# EAGLE board Panel V1 (EAGLE 7.2.0)
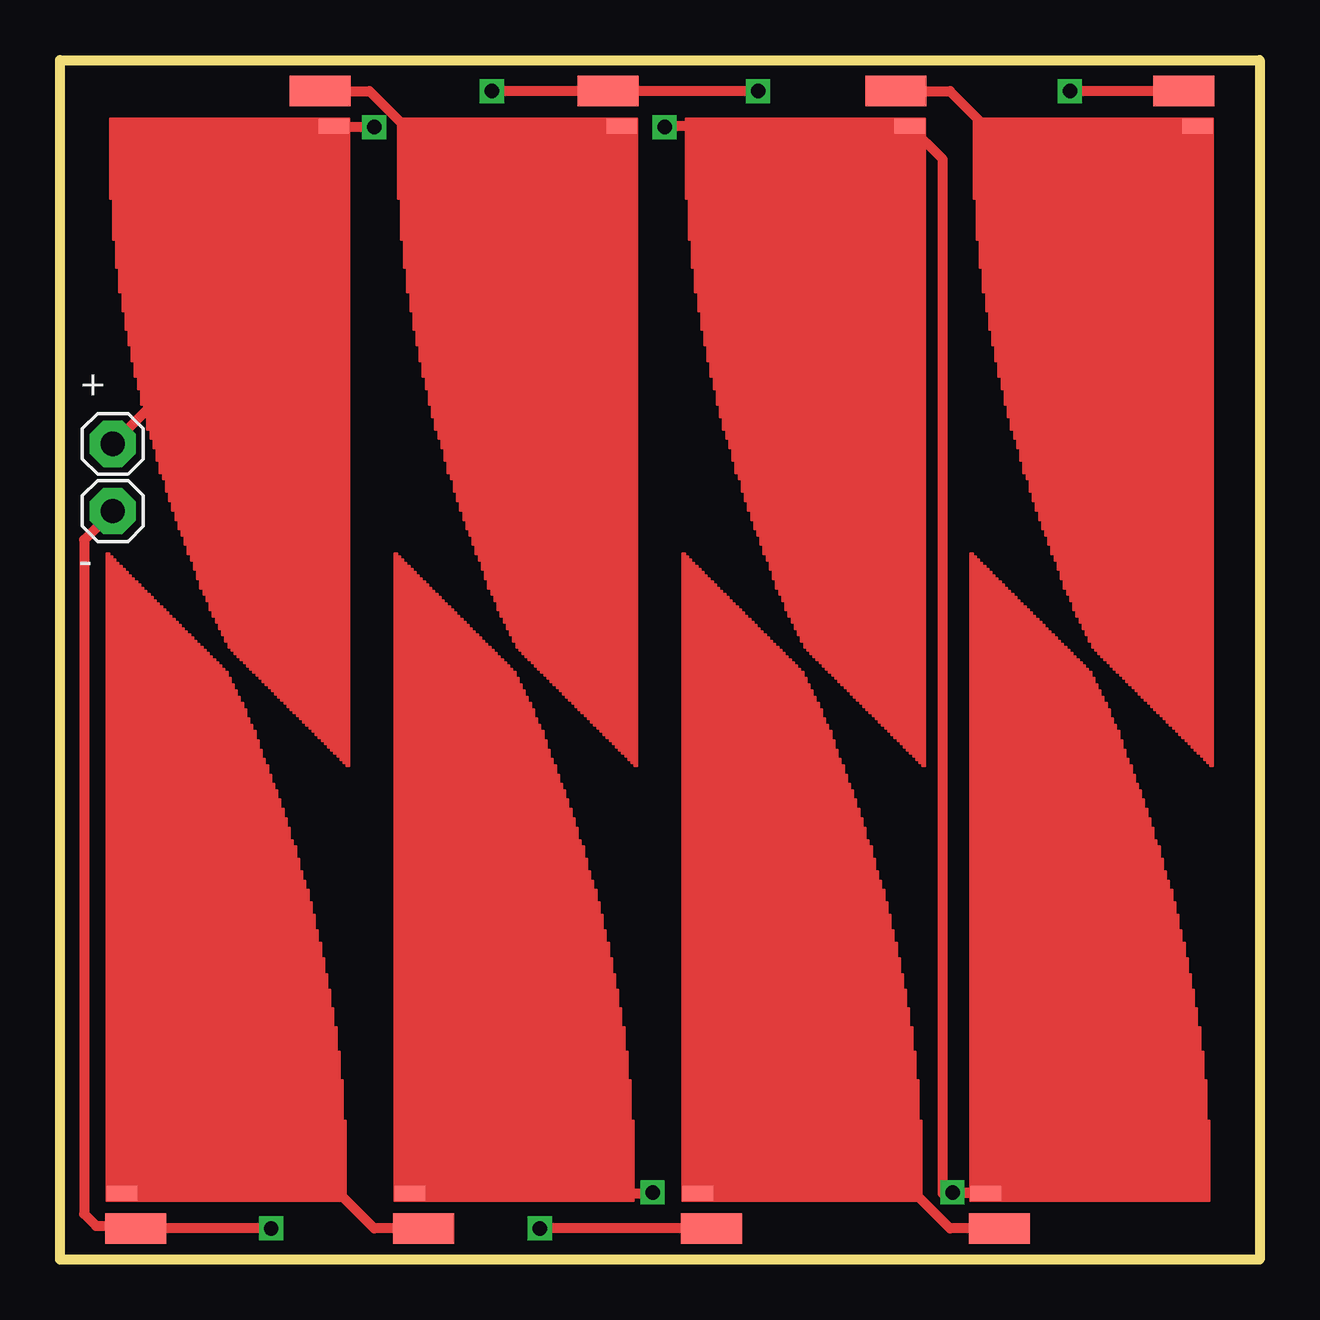
[diagram p0: board, top side]
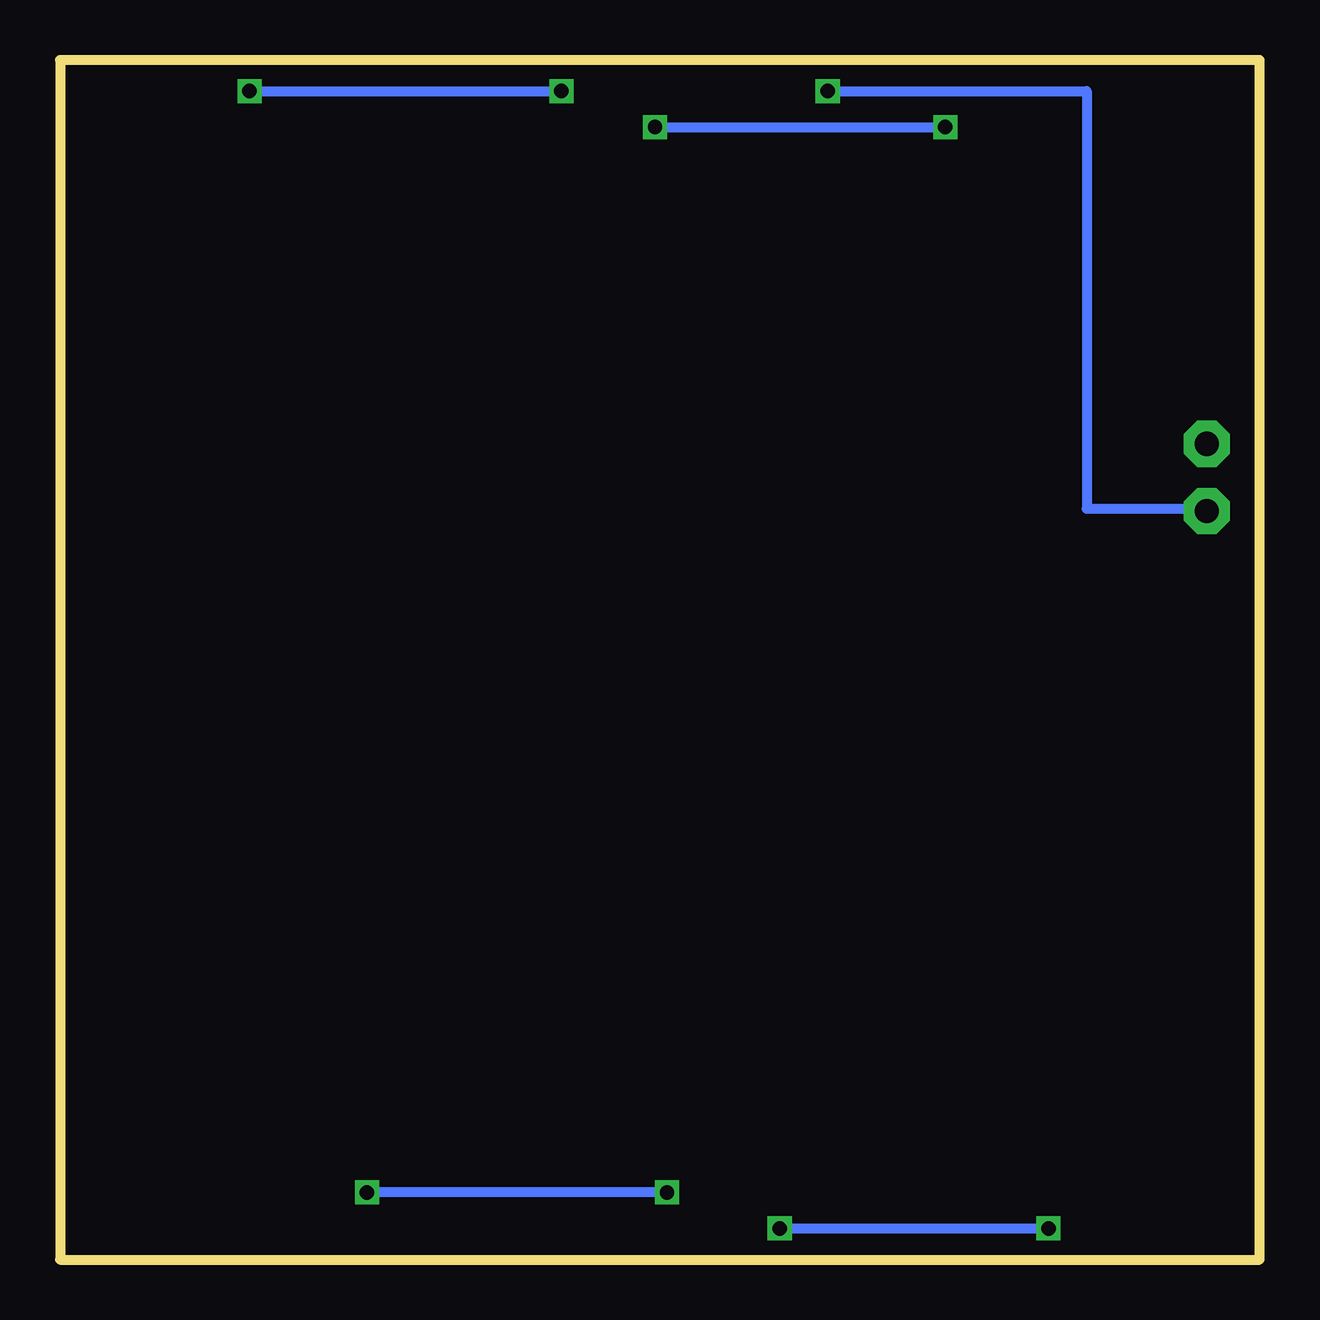
[diagram p1: board, bottom side, seen from below]

Size 50 x 50 mm. Coordinates in mm from the lower left corner, seen from the top.
Outline: 0,0 0,50 50,50 50,0 0,0
Copper layers (1*16): Top 0.035mm / dielectric 1.5mm / Bottom 0.035mm
Design rules "default": minimum track width 10mil, minimum drill 24mil, track to track 8mil, track to pad 8mil, pad to pad 8mil, via to via 8mil, smd to smd 8mil, copper to edge 40mil, drill to drill 8mil, minimum pad ring 10mil, minimum via ring 8mil, stop-mask expansion 4mil, vias tented up to drill 0mil, thermal gap 10mil

## Footprints (pad centres in the part's own frame; a part is rotated, then mirrored left to right if it is on the bottom)
1X01 = drill 1.016 pad 1.93 octagon: 1 0,0
TRISOLX = smd 1.27 x 0.635: P$1 0.584,0.26
SMD1,27-2,54 = smd 1.27 x 2.54: 1 0,0

## Placement (x,y rotation side)
+  [1X01]  2.2,34 0 top
-  [1X01]  2.2,31.2 0 top
E$1  [TRISOLX]  2,2.5 0 top
E$2  [TRISOLX]  14,2.5 0 top
E$3  [TRISOLX]  26,2.5 0 top
E$4  [TRISOLX]  38,2.5 0 top
E$5  [TRISOLX]  12,47.5 180 top
E$6  [TRISOLX]  24,47.5 180 top
E$7  [TRISOLX]  36,47.5 180 top
E$8  [TRISOLX]  48,47.5 180 top
E$9  [SMD1,27-2,54]  3.15,1.3 90 top
E$10  [SMD1,27-2,54]  15.15,1.3 90 top
E$11  [SMD1,27-2,54]  27.15,1.3 90 top
E$12  [SMD1,27-2,54]  39.15,1.3 90 top
E$13  [SMD1,27-2,54]  10.85,48.7 90 top
E$14  [SMD1,27-2,54]  22.85,48.7 90 top
E$15  [SMD1,27-2,54]  34.85,48.7 90 top
E$16  [SMD1,27-2,54]  46.85,48.7 90 top

## Library data of the parts
+ - = adafruit
E$1-E$8 = trisolx
E$9-E$16 = wirepad

## Nets
S$1: E$1.P$1 E$10.1
S$2: E$3.P$1 E$12.1
S$3: E$8.P$1 E$15.1
S$4: E$13.1
S$5: -.1 E$9.1 E$11.1 E$14.1 E$16.1
S$6: +.1 E$2.P$1 E$4.P$1 E$5.P$1 E$7.P$1
S$7: E$6.P$1

## Tracks (layer width: path | path; a pad name or v marks a point on that pad's centre or on a via)
S$1
  Top 0.406: E$10.1 13.1,1.3 11.6,2.8 2.62,2.8 E$1.P$1
S$2
  Top 0.406: E$12.1 37.1,1.3 35.6,2.8 26.62,2.8 E$3.P$1
S$3
  Top 0.406: E$15.1 37.1,48.7 38.6,47.2 47.38,47.2 E$8.P$1
S$4
  Top 0.406: E$13.1 12.9,48.7 14.4,47.2
S$5  (via drill 0.6)
  Top 0.406: E$11.1 v20,1.3 | v8.8,1.3 E$9.1 3.05,1.4 1.5,1.4 1,1.9 1,30 -.1 | E$16.1 v42.1,48.7 | v29.1,48.7 E$14.1 v18,48.7
  Bottom 0.406: v20,1.3 v8.8,1.3 | v42.1,48.7 v29.1,48.7 | v18,48.7 7.2,48.7 7.2,31.3 2.2,31.3 -.1
S$6  (via drill 0.6)
  Top 0.406: v25.2,47.2 25.24,47.24 E$7.P$1 36.8,45.86 36.8,2.76 E$4.P$1 38.58,2.8 v37.2,2.8 | v13.1,47.2 11.46,47.2 E$5.P$1 11.42,43.22 +.1 | E$2.P$1 24.7,2.76 v24.7,2.8
  Bottom 0.406: v25.2,47.2 v13.1,47.2 | v24.7,2.8 v37.2,2.8
S$7
  Top 0.406: 23.38,47.2 E$6.P$1